# EAGLE board schema (EAGLE 7.6.0)
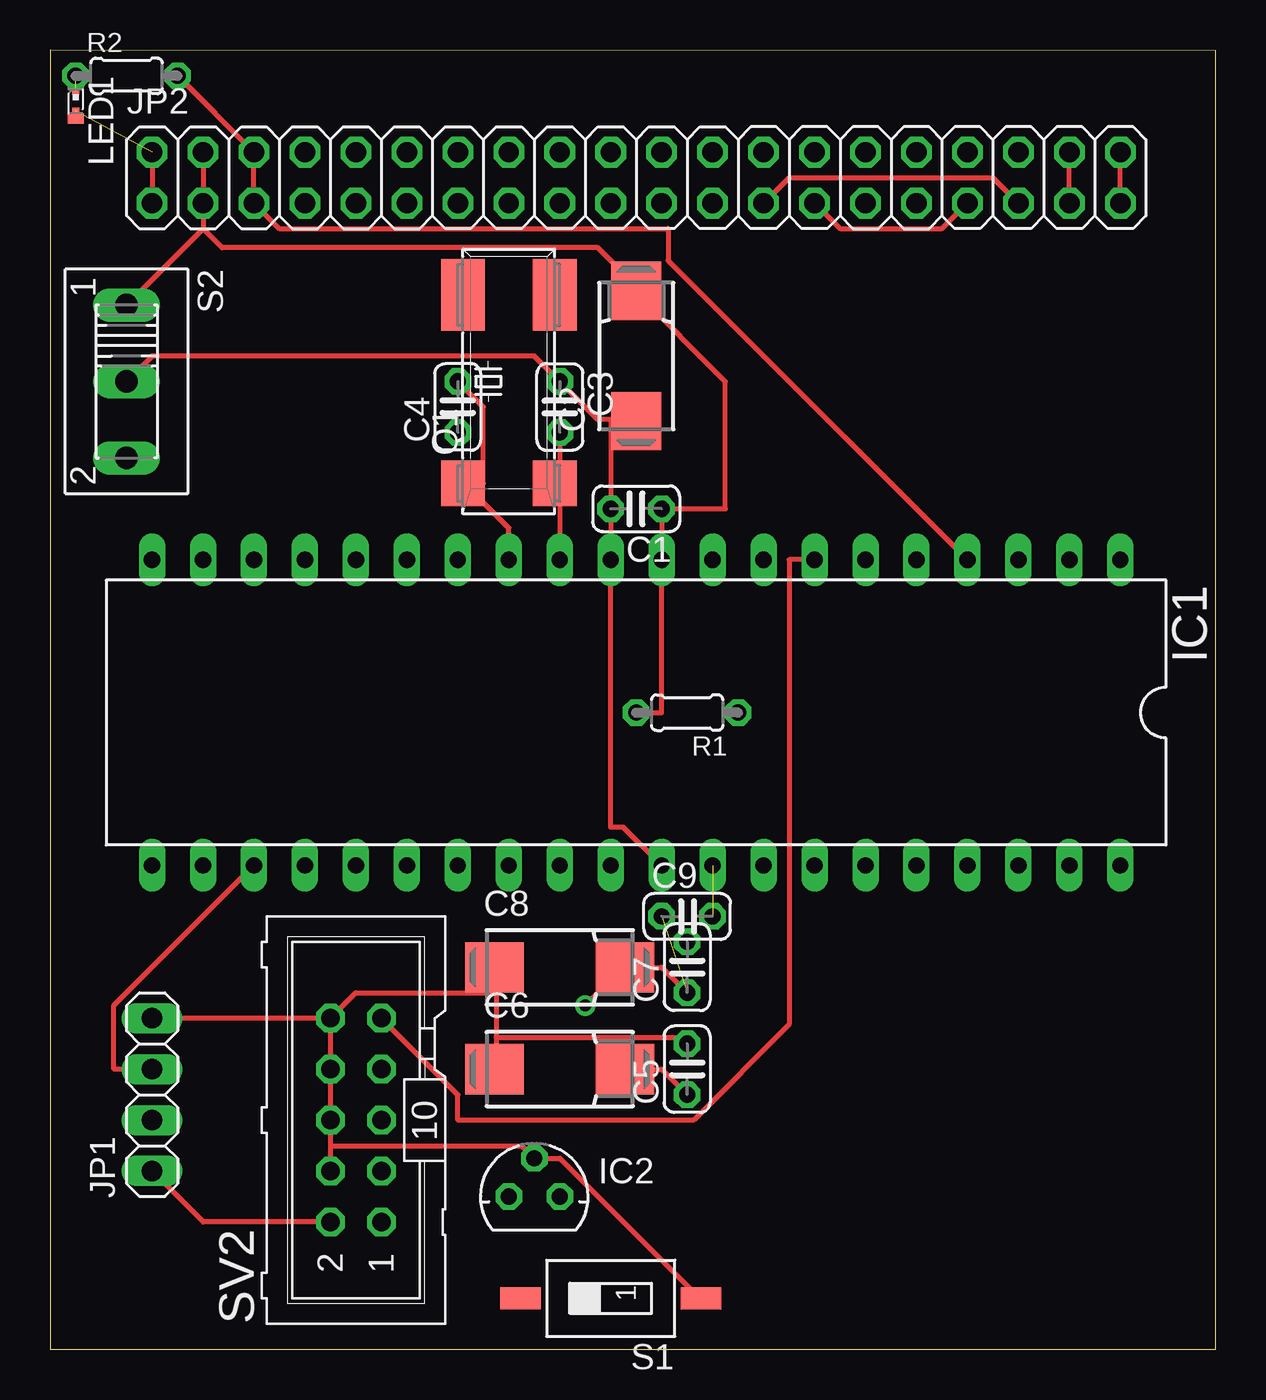
[diagram p0: board, top side]
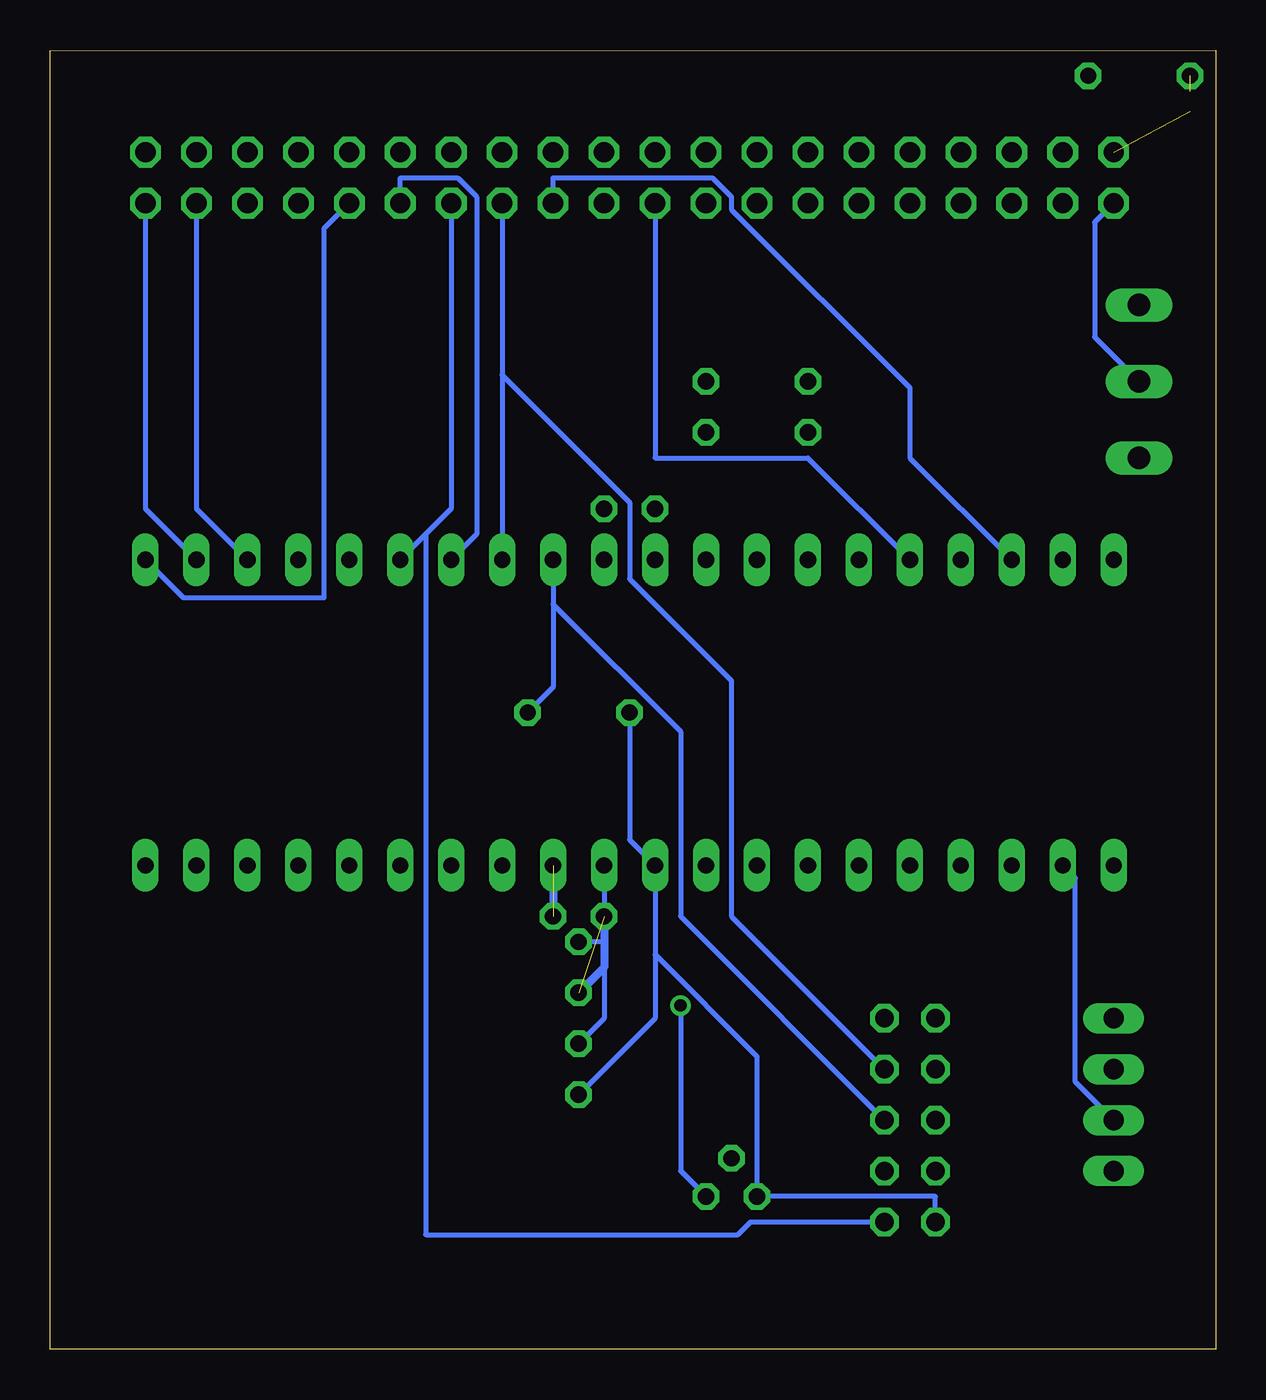
[diagram p1: board, bottom side, seen from below]

Size 58.09 x 64.78 mm. Coordinates in mm from the lower left corner, seen from the top.
Outline: 0,0 58.09,0 58.09,64.76 0,64.78 0,0
Copper layers (1*16): Top 0.035mm / dielectric 1.5mm / Bottom 0.035mm
Design rules "default": minimum track width 10mil, minimum drill 24mil, track to track 8mil, track to pad 8mil, pad to pad 8mil, via to via 8mil, smd to smd 8mil, copper to edge 40mil, drill to drill 8mil, minimum pad ring 10mil, minimum via ring 8mil, stop-mask expansion 4mil, vias tented up to drill 0mil, thermal gap 10mil

## Footprints (pad centres in the part's own frame; a part is rotated, then mirrored left to right if it is on the bottom)
C025-024X044 = drill 0.813 octagon: 1 -1.27,0; 2 1.27,0
085CS_1AR = smd 2.9 x 2.5: + 3.25,0; - -3.25,0
DIL40 = drill 0.813 long: 1 -24.13,-7.62; 2 -21.59,-7.62; 3 -19.05,-7.62; 4 -16.51,-7.62; 5 -13.97,-7.62; 6 -11.43,-7.62; 7 -8.89,-7.62; 8 -6.35,-7.62; 9 -3.81,-7.62; 10 -1.27,-7.62; 11 1.27,-7.62; 12 3.81,-7.62; 13 6.35,-7.62; 14 8.89,-7.62; 15 11.43,-7.62; 16 13.97,-7.62; 17 16.51,-7.62; 18 19.05,-7.62; 19 21.59,-7.62; 20 24.13,-7.62; 21 24.13,7.62; 22 21.59,7.62; 23 19.05,7.62; 24 16.51,7.62; 25 13.97,7.62; 26 11.43,7.62; 27 8.89,7.62; 28 6.35,7.62; 29 3.81,7.62; 30 1.27,7.62; 31 -1.27,7.62; 32 -3.81,7.62; 33 -6.35,7.62; 34 -8.89,7.62; 35 -11.43,7.62; 36 -13.97,7.62; 37 -16.51,7.62; 38 -19.05,7.62; 39 -21.59,7.62; 40 -24.13,7.62
78LXX = drill 0.813 octagon: GND 0,1.905; IN 1.27,0; OUT -1.27,0
1X04 = drill 1.016 long: 1 -3.81,0; 2 -1.27,0; 3 1.27,0; 4 3.81,0
2X20 = drill 1.016 octagon: 1 -24.13,-1.27; 2 -24.13,1.27; 3 -21.59,-1.27; 4 -21.59,1.27; 5 -19.05,-1.27; 6 -19.05,1.27; 7 -16.51,-1.27; 8 -16.51,1.27; 9 -13.97,-1.27; 10 -13.97,1.27; 11 -11.43,-1.27; 12 -11.43,1.27; 13 -8.89,-1.27; 14 -8.89,1.27; 15 -6.35,-1.27; 16 -6.35,1.27; 17 -3.81,-1.27; 18 -3.81,1.27; 19 -1.27,-1.27; 20 -1.27,1.27; 21 1.27,-1.27; 22 1.27,1.27; 23 3.81,-1.27; 24 3.81,1.27; 25 6.35,-1.27; 26 6.35,1.27; 27 8.89,-1.27; 28 8.89,1.27; 29 11.43,-1.27; 30 11.43,1.27; 31 13.97,-1.27; 32 13.97,1.27; 33 16.51,-1.27; 34 16.51,1.27; 35 19.05,-1.27; 36 19.05,1.27; 37 21.59,-1.27; 38 21.59,1.27; 39 24.13,-1.27; 40 24.13,1.27
SMARTLED-TTW = smd 0.8 x 0.5: A 0,-0.875; C 0,0.875 | smd 0.35 x 0.35: A@1 0,-0.5; C@1 0,0.5
86SMX = smd 2.286 x 2.184: 1 -5.08,-2.286; 4 -5.08,2.286 | smd 3.556 x 2.184: 2 4.318,-2.286; 3 4.318,2.286
0204/5 = drill 0.813 octagon: 1 -2.54,0; 2 2.54,0
SMS-001 = smd 1.092 x 2.007: 1 0,-4.496; 2 0,4.496
255SB = drill 1.118 long: 1 -3.81,0; 2 0,0; 3 3.81,0
ML10 = drill 0.914 octagon: 1 -5.08,-1.27; 2 -5.08,1.27; 3 -2.54,-1.27; 4 -2.54,1.27; 5 0,-1.27; 6 0,1.27; 7 2.54,-1.27; 8 2.54,1.27; 9 5.08,-1.27; 10 5.08,1.27

## Placement (x,y rotation side)
C1  100nF  [C025-024X044]  29.21,41.91 180 top
C2  22μF  [085CS_1AR]  29.21,49.53 90 top
C3  22pF  [C025-024X044]  25.4,46.99 270 top
C4  22pF  [C025-024X044]  20.32,46.99 90 top
C5  100nF  [C025-024X044]  31.75,13.97 90 top
C6  47μF  [085CS_1AR]  25.4,13.97 0 top
C7  100nF  [C025-024X044]  31.75,19.05 90 top
C8  47μF  [085CS_1AR]  25.4,19.05 0 top
C9  100nF  [C025-024X044]  31.75,21.59 0 top
IC1  MEGA16-P  [DIL40]  29.21,31.75 180 top
IC2  3,3V  [78LXX]  24.13,7.62 0 top
JP1  [1X04]  5.08,12.7 90 top
JP2  [2X20]  29.21,58.42 0 top
LED1  [SMARTLED-TTW]  1.27,62.23 180 top
Q1  16MHz  [86SMX]  22.86,48.26 90 top
R1  10KΩ  [0204/5]  31.75,31.75 180 top
R2  100Ω  [0204/5]  3.81,63.5 0 top
S1  ON/OFF  [SMS-001]  27.94,2.54 90 top
S2  [255SB]  3.81,48.26 270 top
SV2  [ML10]  15.24,11.43 90 top

## Library data of the parts
C1-C9 R1 R2 = rcl
IC1 = atmel; MPN: ATMEGA16-16PU; OC_FARNELL: 9171142; OC_NEWARK: 01M6885
IC2 = v-reg
JP1 JP2 = pinhead
LED1 = led
Q1 = crystal; OC_FARNELL: 6344860; OC_NEWARK: unknown
S1 = smd-special
S2 = switch
SV2 = con-ml; OC_FARNELL: unknown; OC_NEWARK: unknown

## Nets
GND: C1.2 C2.- C3.1 C5.2 C6.- C7.1 C7.2 C8.+ C8.- C9.1 IC1.11 IC1.31 IC2.GND IC2.IN JP1.4 JP2.1 JP2.2 LED1.C@1 S1.1 S2.2 SV2.4 SV2.6 SV2.8 SV2.10
LCD_CS: IC1.3 JP2.37 JP2.38
LCD_PWM: IC1.4 JP2.5 JP2.6 R2.2
LCD_RS: IC1.2 JP2.39 JP2.40
LCD_RST: IC1.1 JP2.31
MISO: IC1.7 JP2.29 SV2.9
MOSI: IC1.6 JP2.27 JP2.33 SV2.1
N$1: LED1.A@1 R2.1
N$3: S1.2
N$4: C4.1
RST: IC1.9 R1.1 SV2.5
S$1: C9.2 IC1.32
SCK: IC1.8 JP2.25 JP2.35 SV2.7
SCL: IC1.22 JP1.2
SDA: IC1.23 JP1.3
T_CS: IC1.18 JP2.23
T_INT: IC1.16 JP2.19
VCC: C1.1 C2.+ C5.1 C6.+ IC1.10 IC1.30 IC2.OUT JP1.1 JP2.3 JP2.4 R1.2 S2.1 SV2.2
XTAL1: C4.2 IC1.13 Q1.4
XTAL2: C3.2 IC1.12 Q1.1

## Tracks (layer width: path | path; a pad name or v marks a point on that pad's centre or on a via)
GND  (via drill 0.61)  (2 unrouted)
  Top 0.254: JP2.2 JP2.1 | S1.1 32.38,2.54 25.4,9.53 IC2.GND 23.5,10.16 13.97,10.16 | 27.94,46.35 29.21,46.35 C2.- | 27.94,46.35 27.3,46.35 C3.1 24.13,49.53 5.08,49.53 S2.2 | 27.94,46.35 C1.2 IC1.11 27.94,26.03 28.57,26.03 IC1.31 | 22.23,17.78 22.23,19.05 C8.- | 22.23,17.78 22.23,15.56 | 22.23,15.56 22.23,13.97 C6.- | 13.97,10.16 SV2.6 SV2.8 SV2.10 | 13.97,10.16 SV2.4 | SV2.10 JP1.4 | 22.23,17.78 15.24,17.78 SV2.10 | C5.2 31.43,15.56 22.23,15.56 | v26.67,17.14 28.57,19.05 C8.+ 30.48,19.05 C7.1
  Bottom 0.254: S2.2 6.03,50.48 6.03,56.2 JP2.1 | C5.2 30.48,16.51 30.48,19.05 30.48,20.32 | IC1.31 C9.1 30.48,20.32 | 30.48,20.32 C7.2 | IC2.IN 26.67,8.89 v26.67,17.14
  Bottom 0.406: C9.1 30.48,19.05 C7.1
LCD_CS
  Top 0.254: JP2.37 JP2.38
  Bottom 0.254: IC1.3 50.8,41.91 JP2.37
LCD_PWM
  Top 0.254: R2.2 JP2.6 JP2.5 11.43,55.88 30.8,55.88 30.8,54.29 IC1.4
LCD_RS
  Top 0.254: JP2.39 JP2.40
  Bottom 0.254: IC1.2 53.34,41.91 JP2.39
LCD_RST
  Bottom 0.254: IC1.1 51.44,37.46 44.45,37.46 44.45,55.88 JP2.31
MISO
  Top 0.254: SV2.9 20.32,12.7 20.32,11.43 32.07,11.43 36.83,16.19 36.83,39.37 IC1.7
  Bottom 0.254: IC1.7 36.83,40.64 36.83,57.47 37.78,58.42 40.64,58.42 JP2.29
MOSI
  Top 0.254: JP2.33 44.45,55.88 39.37,55.88 JP2.27
  Bottom 0.254: 39.37,40.64 38.1,41.91 JP2.27 | 39.37,40.64 IC1.6 | SV2.1 23.18,6.35 23.81,5.71 39.37,5.71 39.37,40.64
N$1  (1 unrouted)
RST
  Bottom 0.254: R1.1 33.02,33.02 33.02,37.15 | IC1.9 33.02,37.15 | SV2.5 26.67,21.59 26.67,30.8 33.02,37.15
S$1  (1 unrouted)
  Bottom 0.406: IC1.32 C9.2
SCK
  Top 0.254: JP2.35 46.99,58.42 36.83,58.42 JP2.25
  Bottom 0.254: JP2.25 35.56,48.58 | 35.56,48.58 IC1.8 | SV2.7 24.13,21.59 24.13,33.34 29.21,38.42 29.21,42.23 35.56,48.58
SCL
  Bottom 0.254: IC1.22 6.99,23.49 6.99,13.33 JP1.2
SDA
  Top 0.254: IC1.23 3.17,17.14 3.17,13.97 JP1.3
T_CS
  Bottom 0.254: IC1.18 15.24,44.45 15.24,47.94 24.13,56.83 24.13,57.47 25.08,58.42 33.02,58.42 JP2.23
T_INT
  Bottom 0.254: IC1.16 20.32,44.45 27.94,44.45 JP2.19
VCC
  Top 0.254: JP2.4 JP2.3 7.62,55.88 | 7.62,55.88 S2.1 | 7.62,55.88 8.57,54.93 27.3,54.93 29.21,53.02 C2.+ 29.21,52.7 33.66,48.26 33.66,41.91 C1.1 IC1.10 30.48,31.75 R1.2 | JP1.1 7.62,6.35 SV2.2 | C5.1 30.48,13.97 C6.+
  Bottom 0.254: SV2.2 13.97,7.62 IC2.OUT 22.86,14.6 27.94,19.68 | R1.2 29.21,25.4 IC1.30 27.94,19.68 | C5.1 27.94,16.51 27.94,19.68
XTAL1
  Top 0.254: 20.64,43.18 22.86,40.96 IC1.13 | C4.2 21.59,46.99 21.59,43.18 20.64,43.18 | 20.64,43.18 Q1.4
XTAL2
  Top 0.254: C3.2 25.4,43.18 | 25.4,43.18 IC1.12 | 25.4,43.18 Q1.1